# EAGLE board printerInterface 02 (EAGLE 5.03)

Size 100 x 80 mm. Coordinates in mm from the lower left corner, seen from the top.
Outline: 0,0 100,0 100,80 0,80 0,0
Copper layers (1*16): Top 0.035mm / dielectric 1.5mm / Bottom 0.035mm
Design rules "default": minimum track width 10mil, minimum drill 24mil, track to track 8mil, track to pad 8mil, pad to pad 8mil, via to via 8mil, smd to smd 8mil, copper to edge 40mil, drill to drill 8mil, minimum pad ring 10mil, minimum via ring 8mil, stop-mask expansion 4mil, vias tented up to drill 0mil, thermal gap 10mil

## Footprints (pad centres in the part's own frame; a part is rotated, then mirrored left to right if it is on the bottom)
DIL20 = drill 0.813 long: 1 -11.43,-3.81; 2 -8.89,-3.81; 3 -6.35,-3.81; 4 -3.81,-3.81; 5 -1.27,-3.81; 6 1.27,-3.81; 7 3.81,-3.81; 8 6.35,-3.81; 9 8.89,-3.81; 10 11.43,-3.81; 11 11.43,3.81; 12 8.89,3.81; 13 6.35,3.81; 14 3.81,3.81; 15 1.27,3.81; 16 -1.27,3.81; 17 -3.81,3.81; 18 -6.35,3.81; 19 -8.89,3.81; 20 -11.43,3.81
DIL16 = drill 0.813 long: 1 -8.89,-3.81; 2 -6.35,-3.81; 3 -3.81,-3.81; 4 -1.27,-3.81; 5 1.27,-3.81; 6 3.81,-3.81; 7 6.35,-3.81; 8 8.89,-3.81; 9 8.89,3.81; 10 6.35,3.81; 11 3.81,3.81; 12 1.27,3.81; 13 -1.27,3.81; 14 -3.81,3.81; 15 -6.35,3.81; 16 -8.89,3.81
CART = drill 1.2 offset: P$1 -38.1,0; P$2 -35.56,0; P$3 -33.02,0; P$4 -30.48,0; P$5 -27.94,0; P$6 -25.4,0; P$7 -22.86,0; P$8 -20.32,0; P$9 -17.78,0; P$10 -15.24,0; P$11 -12.7,0; P$12 -10.16,0; P$13 -7.62,0; P$14 -5.08,0; P$15 -2.54,0; P$16 0,0; P$17 2.54,0; P$18 5.08,0; P$19 7.62,0; P$20 10.16,0; P$21 12.7,0; P$22 15.24,0; P$23 17.78,0; P$24 20.32,0; P$25 22.86,0; P$26 25.4,0; P$27 27.94,0; P$28 30.48,0; P$29 33.02,0; P$30 35.56,0; P$31 -38.1,-6.35; P$32 -35.56,-6.35; P$33 -33.02,-6.35; P$34 -30.48,-6.35; P$35 -27.94,-6.35; P$36 -25.4,-6.35; P$37 -22.86,-6.35; P$38 -20.32,-6.35; P$39 -17.78,-6.35; P$40 -15.24,-6.35; P$41 -12.7,-6.35; P$42 -10.16,-6.35; P$43 -7.62,-6.35; P$44 -5.08,-6.35; P$45 -2.54,-6.35; P$46 0,-6.35; P$47 2.54,-6.35; P$48 5.08,-6.35; P$49 7.62,-6.35; P$50 10.16,-6.35; P$51 12.7,-6.35; P$52 15.24,-6.35; P$53 17.78,-6.35; P$54 20.32,-6.35; P$55 22.86,-6.35; P$56 25.4,-6.35; P$57 27.94,-6.35; P$58 30.48,-6.35; P$59 33.02,-6.35; P$60 35.56,-6.35
F25HP = drill 1.016 octagon: 1 -16.561,-1.27; 2 -13.792,-1.27; 3 -11.049,-1.27; 4 -8.28,-1.27; 5 -5.512,-1.27; 6 -2.769,-1.27; 7 0,-1.27; 8 2.769,-1.27; 9 5.512,-1.27; 10 8.28,-1.27; 11 11.049,-1.27; 12 13.792,-1.27; 13 16.561,-1.27; 14 -15.189,1.27; 15 -12.421,1.27; 16 -9.652,1.27; 17 -6.909,1.27; 18 -4.14,1.27; 19 -1.372,1.27; 20 1.372,1.27; 21 4.14,1.27; 22 6.909,1.27; 23 9.652,1.27; 24 12.421,1.27; 25 15.189,1.27 | drill 3.302 pad 5.08 round: G1 -23.52,0; G2 23.52,0
PAK100/2500-60 = drill 1 pad 1.422 round: 1 -36.83,-1.27; 2 -36.83,1.27; 3 -34.29,-1.27; 4 -34.29,1.27; 5 -31.75,-1.27; 6 -31.75,1.27; 7 -29.21,-1.27; 8 -29.21,1.27; 9 -26.67,-1.27; 10 -26.67,1.27; 11 -24.13,-1.27; 12 -24.13,1.27; 13 -21.59,-1.27; 14 -21.59,1.27; 15 -19.05,-1.27; 16 -19.05,1.27; 17 -16.51,-1.27; 18 -16.51,1.27; 19 -13.97,-1.27; 20 -13.97,1.27; 21 -11.43,-1.27; 22 -11.43,1.27; 23 -8.89,-1.27; 24 -8.89,1.27; 25 -6.35,-1.27; 26 -6.35,1.27; 27 -3.81,-1.27; 28 -3.81,1.27; 29 -1.27,-1.27; 30 -1.27,1.27; 31 1.27,-1.27; 32 1.27,1.27; 33 3.81,-1.27; 34 3.81,1.27; 35 6.35,-1.27; 36 6.35,1.27; 37 8.89,-1.27; 38 8.89,1.27; 39 11.43,-1.27; 40 11.43,1.27; 41 13.97,-1.27; 42 13.97,1.27; 43 16.51,-1.27; 44 16.51,1.27; 45 19.05,-1.27; 46 19.05,1.27; 47 21.59,-1.27; 48 21.59,1.27; 49 24.13,-1.27; 50 24.13,1.27; 51 26.67,-1.27; 52 26.67,1.27; 53 29.21,-1.27; 54 29.21,1.27; 55 31.75,-1.27; 56 31.75,1.27; 57 34.29,-1.27; 58 34.29,1.27; 59 36.83,-1.27; 60 36.83,1.27

## Placement (x,y rotation side)
IC1  74273N  [DIL20]  26.67,39.37 90 top
IC2  74LS138N  [DIL16]  43.18,39.37 90 top
U$1  CART  [CART]  50.8,11.43 0 top
X1  [F25HP]  8.89,44.45 90 top
X2  2560-  [PAK100/2500-60]  52.07,76.2 0 top

## Library data of the parts
IC1 IC2 = 74xx-us
U$1 = playpower
X1 = con-subd
X2 = con-3m

## Nets
GND: IC1.10 IC2.8 U$1.P$55
N$1: IC1.2 X1.2
N$2: IC1.5 X1.4
N$3: IC1.6 X1.6
N$4: IC1.9 X1.8
N$5: IC1.12 X1.9
N$6: IC1.15 X1.7
N$7: IC1.16 X1.5
N$8: IC1.19 X1.3
N$9: X2.28 X2.38
VCC: IC1.20 IC2.16

## Tracks (layer width: path | path; a pad name or v marks a point on that pad's centre or on a via)
GND  (2 unrouted)
N$1  (1 unrouted)
N$2  (1 unrouted)
N$3  (1 unrouted)
N$4  (1 unrouted)
N$5  (1 unrouted)
N$6  (1 unrouted)
N$7  (1 unrouted)
N$8  (1 unrouted)
N$9  (1 unrouted)
VCC  (1 unrouted)